# Altium PCB stm32-motor-driver.PcbDoc
Units mil, origin at the board's own origin, x right, y up, seen from the top; angles counter-clockwise.
Board outline 1479 x 1039 mil, 4 copper layers (L1, L2, L3, L4), stack 63.43 mil thick; 20 components, 24 nets, 118 pads, 126 vias.
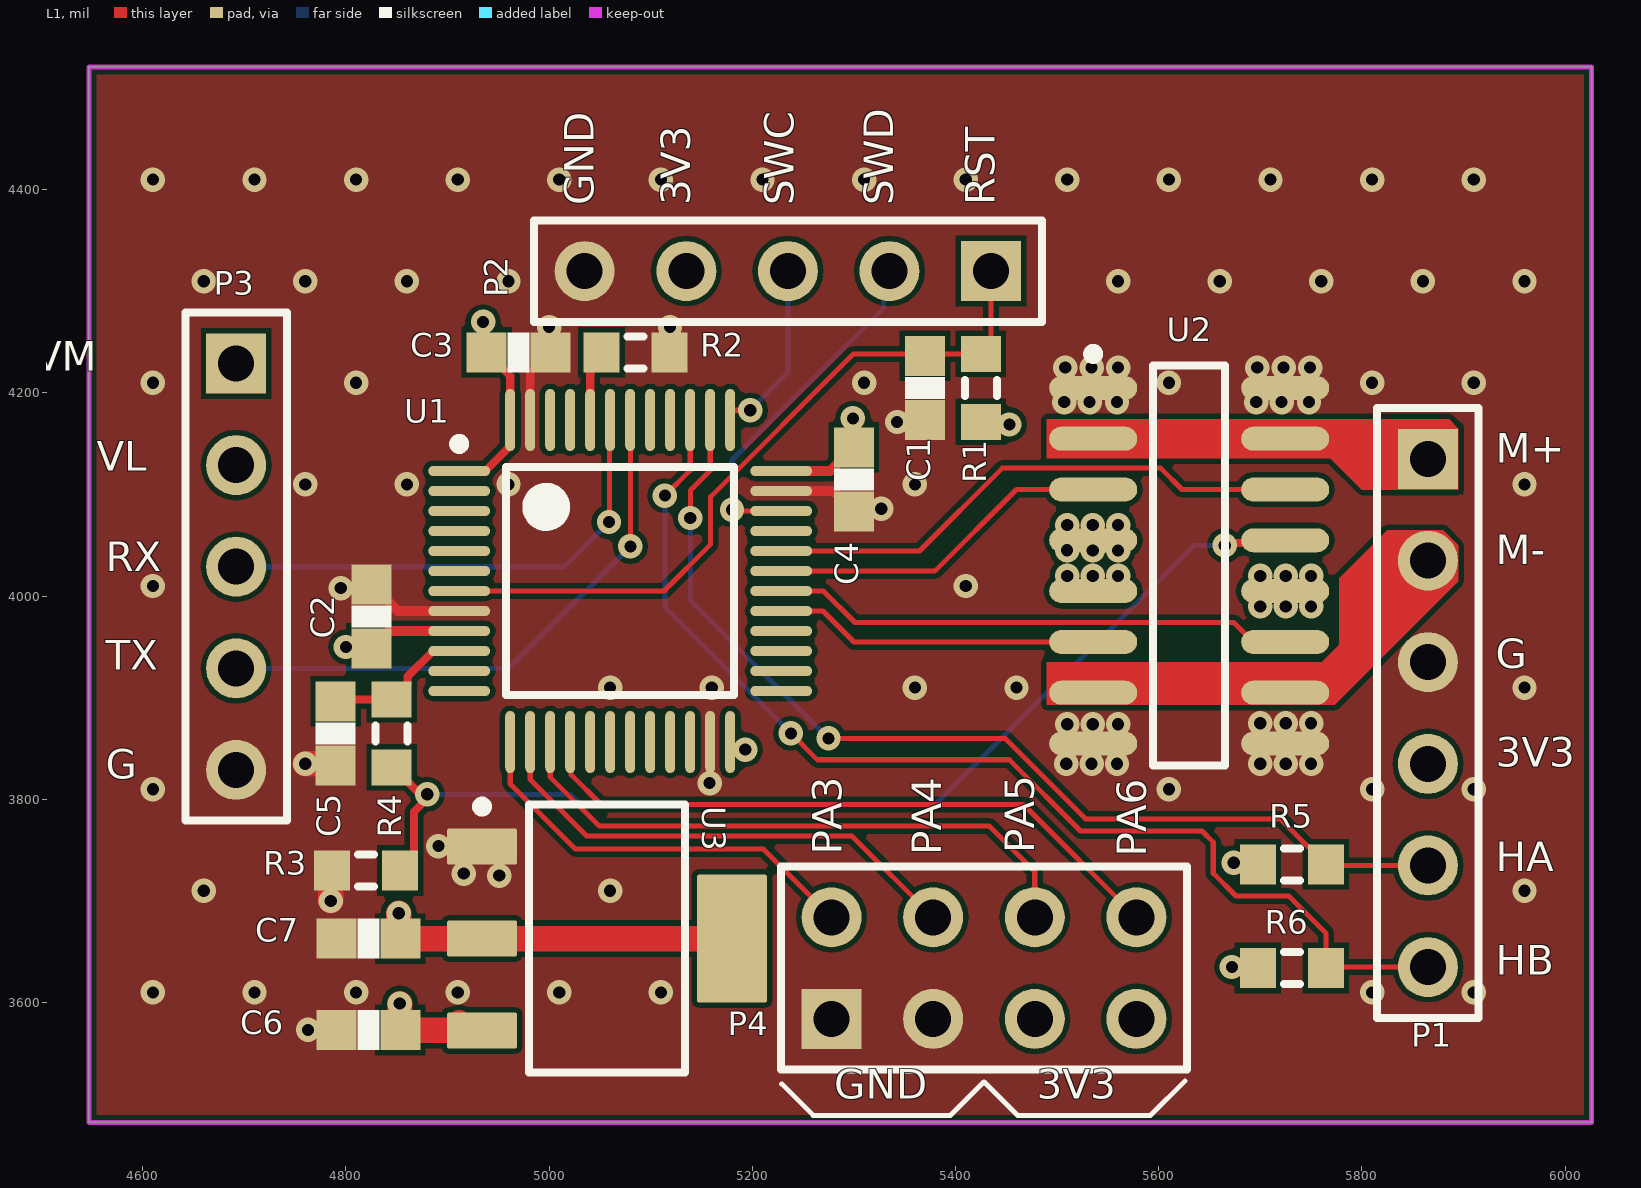
[diagram p0: L1 view]
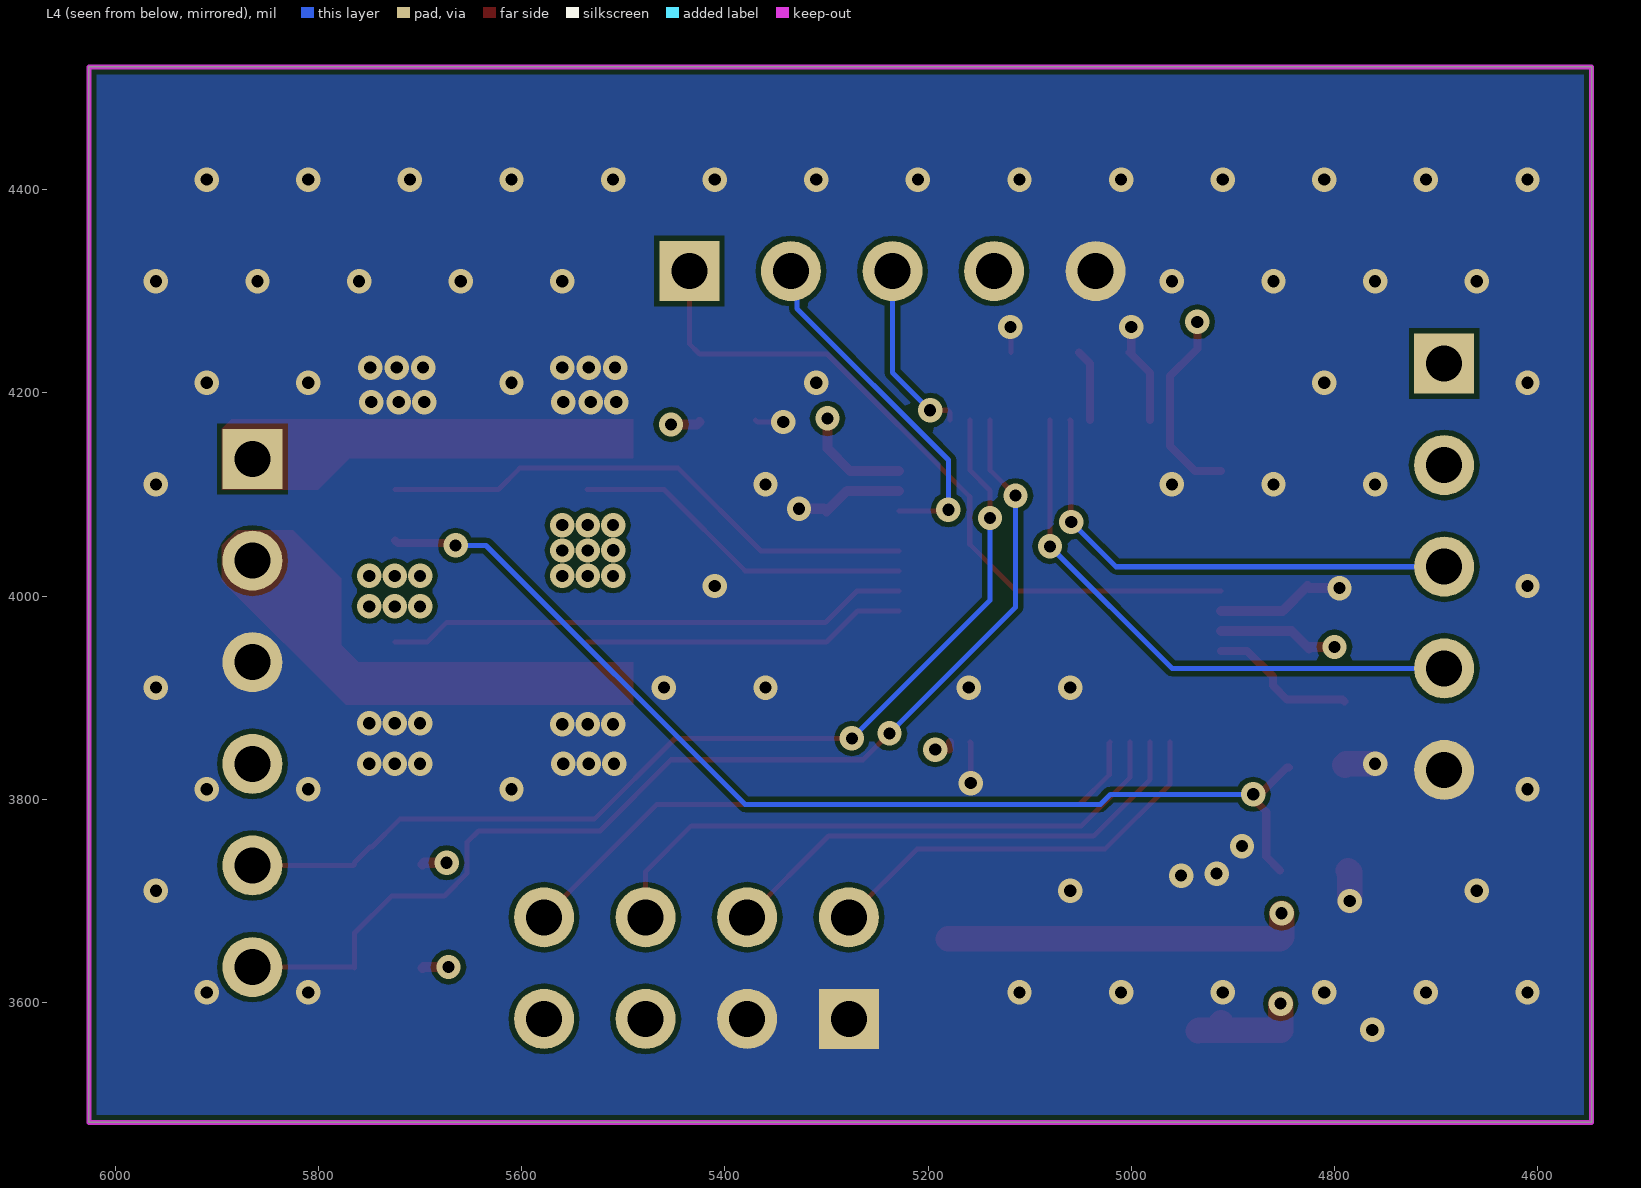
[diagram p1: L4 view, seen from below]
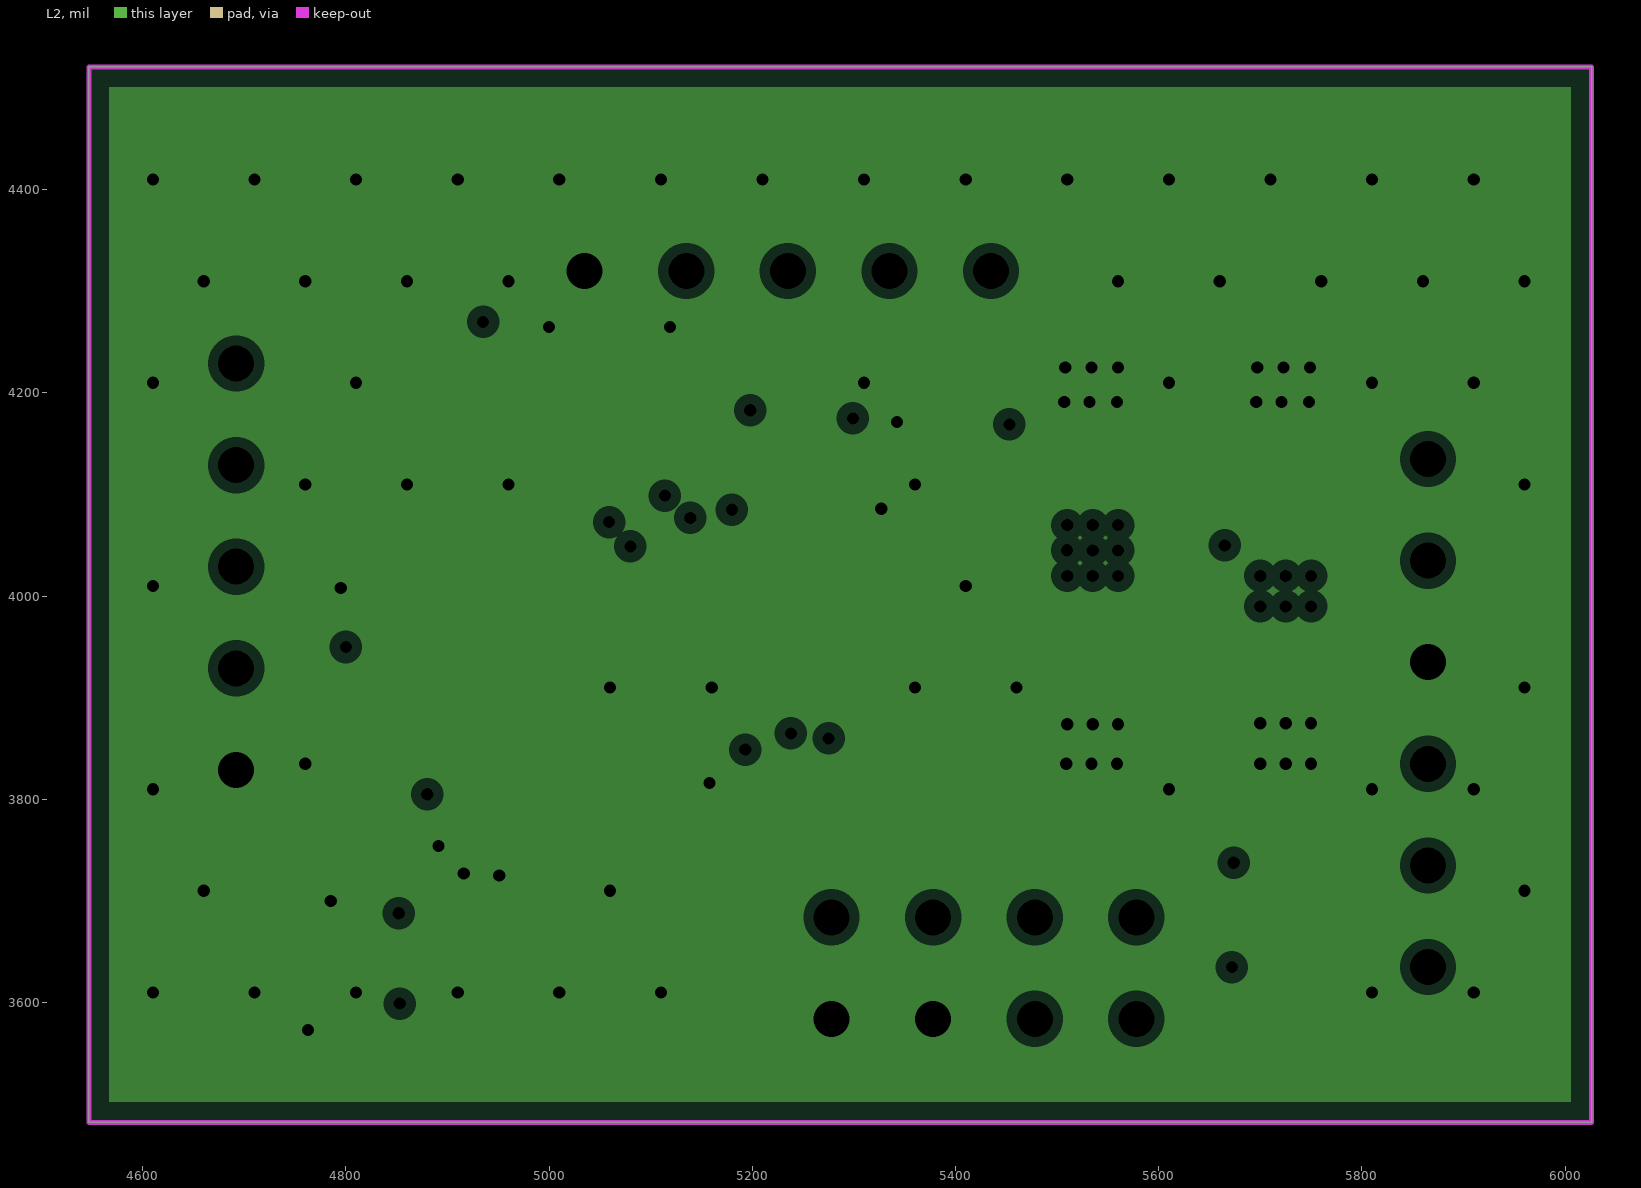
[diagram p2: L2, clearances drawn from the general rule]
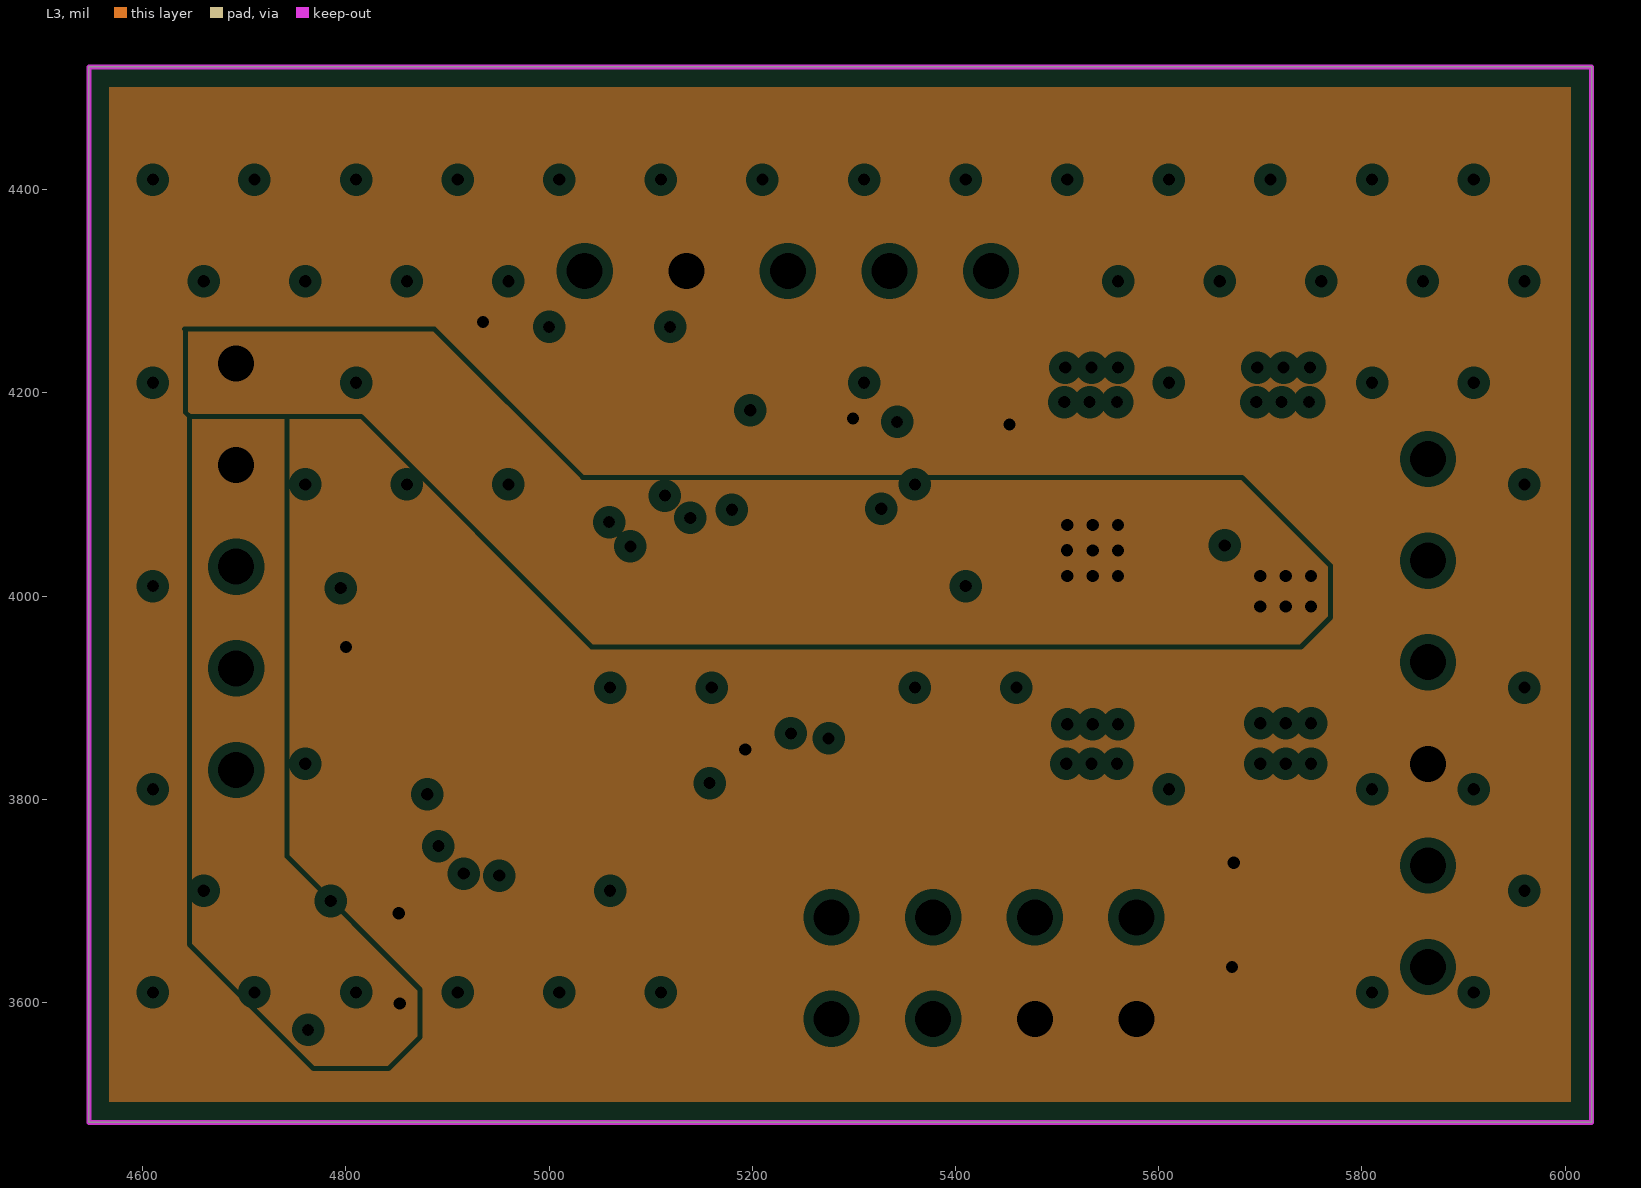
[diagram p3: L3, clearances drawn from the general rule]
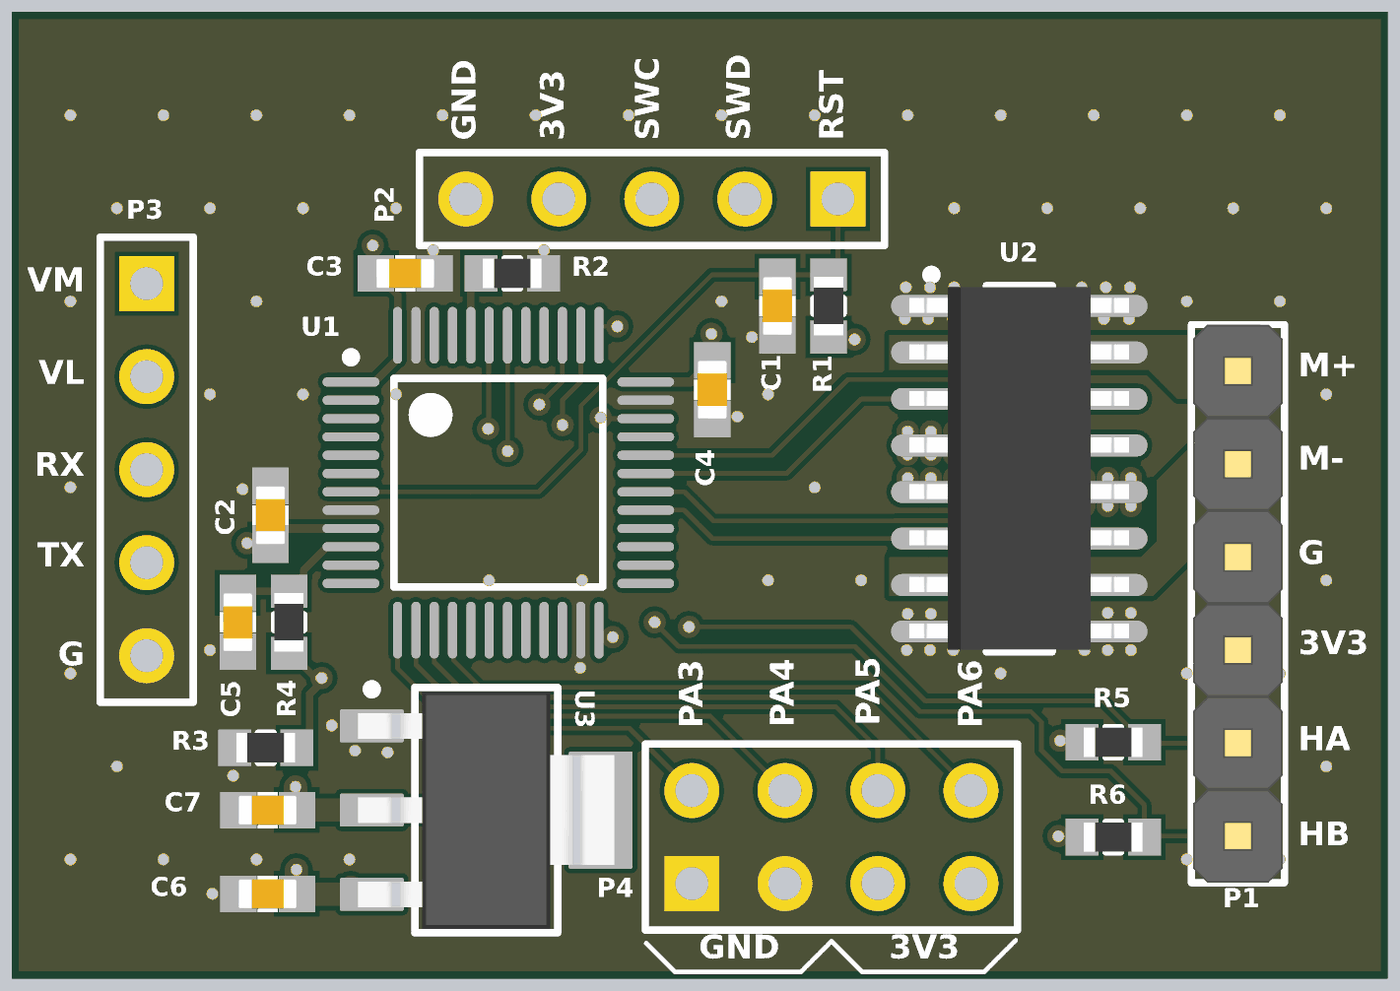
[diagram p4: 3D render of the assembled board from above, using the file's embedded part models]

## Layer stack, top to bottom
Top Solder: solder mask 0.4, Solder Resist, Dk 3.5
L1: signal copper 1.4
Dielectric 2: prepreg 3.937, PP-006, Dk 4.1
L2: plane copper 1.378, net GND
Dielectric 1: dielectric 50, FR-4, Dk 4.8
L3: plane copper 1.378, net (Multiple Nets)
Dielectric 3: prepreg 3.937, PP-006, Dk 4.1
L4: signal copper 1.4
Bottom Solder: solder mask 0.4, Solder Resist, Dk 3.5

## Board outline
4547,3482 4547,4521 6026,4521 6026,3482

## Design rules (kind name [scope] priority, off if disabled: settings)
Clearance [All] p1: gap=5 ignorepadtopadclearanceinfootprint=TRUE
ComponentClearance [All] p1: gap=0 collisioncheckmode=3 verticalgap=10 showdistances=FALSE
HoleSize [All] p1: absolutevalues=TRUE maxlimit=250 minlimit=12 maxpercent=80.000 minpercent=20.000
MinimumSolderMaskSliver [All] p1 off: minsoldermaskwidth=0
PlaneClearance [All] p1: clearance=10
PlaneConnect [All] p1: planeconnectstyle=Direct reliefexpansion=20 reliefentries=4 reliefconductorwidth=10 reliefairgap=10
PolygonConnect [All] p1: connectstyle=Direct reliefconductorwidth=10 reliefentries=4 polygonreliefangle="90 Angle" airgapwidth=10
RoutingVias [All] p1: holewidth=12 width=24 viastyle="Through Hole" minholewidth=12 minwidth=24 maxholewidth=100 maxwidth=200 useviatemplates=TRUE viatemplateguid#1={1C40CA77-43A6-4E52-A6EE-6E91B8191E52} viatemplatename#1=v61h30m0mx0
SilkToSilkClearance [All] p1 off: silktosilkclearance=0
SilkToSolderMaskClearance [IsPad] p1 off: minsilkscreentomaskgap=0 clearancetoexposedcopper=TRUE
SolderMaskExpansion [All] p1: expansion=0 istentingtop=FALSE
Width [All] p1: maxlimit=1000 minlimit=5 preferedwidth=5 minimp=50.000000 maximp=50.000000 favimp=50.000000
23 further rules are at their usual default settings.

## Components (designator, comment, footprint, x,y, rotation, side; value= is the part's Value field where it differs from the comment)
C1 "100n CAPC1608N" CAPC1608N 5370,4205 r90 top value=100n
C2 "100n CAPC1608N" CAPC1608N 4825,3980 r270 top value=100n
C3 "100n CAPC1608N" CAPC1608N 4970,4240 r180 top value=100n
C4 "100n CAPC1608N" CAPC1608N 5300,4115 r90 top value=100n
C5 "100n CAPC1608N" CAPC1608N 4790,3865 r90 top value=100n
C6 "1uF CAPC1608N" CAPC1608N 4822,3573 r0 top value=1uF
C7 "10uF CAPC1608N" CAPC1608N 4822,3663 r0 top value=10uF
P1 "Header 6" HDR1X6-PINS 5865,4135 r270 top
P2 "Header 5" HDR1X5 5435,4320 r180 top
P3 "Header 5" HDR1X5 4692,4229 r270 top
P4 "Header 4X2" HDR2X4 5278,3584 r0 top
R1 "10k RESC1608N" RESC1608N 5425,4205 r270 top value=10k
R2 "10k RESC1608N" RESC1608N 5085,4240 r180 top value=10k
R3 "1k RESC1608N" RESC1608N 4820,3730 r0 top value=1k
R4 "10k RESC1608N" RESC1608N 4845,3865 r90 top value=10k
R5 "10k RESC1608N" RESC1608N 5731,3736 r180 top value=10k
R6 "10k RESC1608N" RESC1608N 5731,3634 r180 top value=10k
U1 "STM32F103C8T6" STM-LQFP48_L 5070,4015 r0 top
U2 "VNH7100BASTR" SOIC127P600-16N 5630,4030 r0 top
U3 "1117-3.3" DCY0004A_N 5057,3663 r0 top

## Footprints (in the part's own frame and the unit in brackets; to place one, negate y for a bottom-side part, rotate by r counter-clockwise, add the part's x,y. Pads: shape width x height; smd on the part's side, far side on the other; paste and mask are expansions set on the pad)
CAPC1608N [mm] "Chip Capacitor (0603), Body 1.6x0.8mm, IPC Medium Density"
  rect 1x1 smd: 1(-0.8,0) 2(0.8,0)
  silkscreen extent -0.28,-0.5 0.28,0.5, body extent -0.8,-0.41 0.8,0.41, height 0.91
DCY0004A_N [mm] "SOT223, 4-Leads, Body 6.7x3.7mm, Pitch 2.3mm, IPC Medium Density"
  rrect11% 1.75x0.9 smd: 1(-3.125,2.3) 2(-3.125,0) 3(-3.125,-2.3)
  rrect6% 1.75x3.2 smd: 4(3.125,0)
  silkscreen extent -3.25,-3.35 1.95,3.42, body extent -3.5,-3.25 3.5,3.25, height 1.62
HDR1X5 [mm] "Connector; Header; 5 Position"
  rect 1.5x1.5 hole 0.9: 1(0,0)
  round 1.5 hole 0.9: 2(2.54,0) 3(5.08,0) 4(7.62,0) 5(10.16,0)
  silkscreen extent -1.27,-1.27 11.43,1.27
HDR1X6-PINS [mm] "Connector; Header; 6 Position"
  rect 1.5x1.5 hole 0.9: 1(0,0)
  round 1.5 hole 0.9: 2(2.54,0) 3(5.08,0) 4(7.62,0) 5(10.16,0) 6(12.7,0)
  silkscreen extent -1.27,-1.27 13.97,1.27, body extent -1.27,-1.22 13.97,1.22, height 10.3
HDR2X4 [mm] "Connector; Header; 4x2 Position"
  rect 1.5x1.5 hole 0.9: 1(0,0)
  round 1.5 hole 0.9: 2(0,2.54) 3(2.54,0) 4(2.54,2.54) 5(5.08,0) 6(5.08,2.54) 7(7.62,0) 8(7.62,2.54)
  silkscreen extent -1.27,-1.27 8.89,3.81
RESC1608N [mm] "Chip Resistor, Body 1.6x0.8mm, IPC Medium Density"
  rect 0.9x1 smd: 1(-0.85,0) 2(0.85,0)
  silkscreen extent -0.2,-0.4 0.2,0.4, body extent -0.8,-0.4 0.8,0.4, height 0.55
SOIC127P600-16N [mm] "SOIC, 16-Leads, Body 9.9x3.9mm, Pitch 1.27mm, IPC Medium Density"
  oval 2.2x0.6 smd: 1(-2.4,4.445) 2(-2.4,3.175) 3(-2.4,1.905) 4(-2.4,0.635) 5(-2.4,-0.635) 6(-2.4,-1.905) 7(-2.4,-3.175) 8(-2.4,-4.445) 9(2.4,-4.445) 10(2.4,-3.175) 11(2.4,-1.905) 12(2.4,-0.635) 13(2.4,0.635) 14(2.4,1.905) 15(2.4,3.175) 16(2.4,4.445)
  silkscreen extent -2.52,-5 0.9,5.42, body extent -3.01,-4.94 2.99,4.97, height 1.4
STM-LQFP48_L [mm] "QFP, 48-Leads, Body 7x7mm, Pitch 0.5mm, IPC High Density"
  oval 1.55x0.25 smd: 1(-4.025,2.75) 2(-4.025,2.25) 3(-4.025,1.75) 4(-4.025,1.25) 5(-4.025,0.75) 6(-4.025,0.25) 7(-4.025,-0.25) 8(-4.025,-0.75) 9(-4.025,-1.25) 10(-4.025,-1.75) 11(-4.025,-2.25) 12(-4.025,-2.75) 25(4.025,-2.75) 26(4.025,-2.25) 27(4.025,-1.75) 28(4.025,-1.25) 29(4.025,-0.75) 30(4.025,-0.25) 31(4.025,0.25) 32(4.025,0.75) 33(4.025,1.25) 34(4.025,1.75) 35(4.025,2.25) 36(4.025,2.75)
  oval 0.25x1.55 smd: 13(-2.75,-4.025) 14(-2.25,-4.025) 15(-1.75,-4.025) 16(-1.25,-4.025) 17(-0.75,-4.025) 18(-0.25,-4.025) 19(0.25,-4.025) 20(0.75,-4.025) 21(1.25,-4.025) 22(1.75,-4.025) 23(2.25,-4.025) 24(2.75,-4.025) 37(2.75,4.025) 38(2.25,4.025) 39(1.75,4.025) 40(1.25,4.025) 41(0.75,4.025) 42(0.25,4.025) 43(-0.25,4.025) 44(-0.75,4.025) 45(-1.25,4.025) 46(-1.75,4.025) 47(-2.25,4.025) 48(-2.75,4.025)
  silkscreen extent -4.15,-2.85 2.85,3.55, body extent -3.5,-3.5 3.5,3.5, height 1.6

## Part data
C1 C2 C3 C4 C5 C6 C7: library part "Cap Chip", "Capacitor", Tolerance=%
P1: "Header, 6-Pin", LatestRevisionDate=17-Jul-2002, LatestRevisionNote="Re-released for DXP Platform.", Publisher="Altium Limited"
P2 P3: "Header, 5-Pin", LatestRevisionDate=17-Jul-2002, LatestRevisionNote="Re-released for DXP Platform.", Publisher="Altium Limited"
P4: "Header, 4-Pin, Dual row", LatestRevisionDate=17-Jul-2002, LatestRevisionNote="Re-released for DXP Platform.", Publisher="Altium Limited"
R1 R2 R3 R4 R5 R6: library part "Res Chip", "Chip Resistor", Tolerance=%
U1: library part CMP-0237-00215-3, "ARM Cortex-M3 32-bit MCU, 64 KB Flash, 20 KB Internal RAM, 37 I/Os, 48-pin LQFP, -40 to 85 degC, Tray", I/Os (High Current)=37, Operating Frequency(F) (Processor speed) (MHz)=72, Supply Voltage(Vcc) min (V)=2, A/D Converter="2x12-bit (10 Channel)", ComponentLink1Description="Manufacturer URL", ComponentLink1URL=http://www.st.com/web/en/home.html, ComponentLink2Description=Datasheet, ComponentLink2URL=http://www.st.com/st-web-ui/static/active/en/resource/technical/document/datasheet/CD00161566.pdf, ComponentLink3Description="Package Specification", ComponentLink3URL=http://www.st.com/st-web-ui/static/active/en/resource/technical/document/datasheet/DM00058181.pdf, Core="ARM Cortex-M3", DatasheetVersion="Rev. 16", FLASH Size (Prog) (kB)=64, Internal RAM Size (kB)=20, Mounting Technology="Surface Mount", PackageDescription="48-Pin Low Profile Quad Flat Package, 7 x 7 mm Body, 0.5 mm Pitch", PackageReference=LQFP48, PackageVersion="Rev. 6, 06/2013", Packing=Tray, PartNumber=STM32F103C8T6
U2: "SO 16 .15 TO JEDEC MS-012", Current - Output=15A, Manufacturer=STMicroelectronics, Operating Temperature="-40°C ~ 150°C (TJ)", Package / Case="16-SOIC (0.154\", 3.90mm Width)", Supplier Device Package=16-SO, Supplier Part Number 1=497-17627-1-ND, Voltage - Load="4 V ~ 28 V", Applications=Automotive, Category="Integrated Circuits (ICs)", ComponentLink1Description=http://www.st.com/content/ccc/resource/technical/document/datasheet/group3/28/a2/d7/89/b7/da/4f/5c/DM00314832/files/DM00314832.pdf/jcr:content/translations/en.DM00314832.pdf, ComponentLink1URL=http://www.st.com/content/ccc/resource/technical/document/datasheet/group3/28/a2/d7/89/b7/da/4f/5c/DM00314832/files/DM00314832.pdf/jcr:content/translations/en.DM00314832.pdf, Function="Driver - Fully Integrated, Control and Power Stage", Interface=PWM, Manufacturer Part Number=VNH7100BASTR, Motor Type - AC, DC="Brushed DC", Motor Type - Stepper=-, Mounting Type="Surface Mount", Output Configuration="Half Bridge (2)", Packaging="Cut Tape (CT)", Part Status=Active, Pricing 1="1=3.2, 10=2.871, 100=2.352, 500=2.00218, 1000=1.68858 (USD)", RoHS="RoHS Compliant", Step Resolution=-, Stock 1=100, Supplier 1=Digi-Key, Technology="Power MOSFET", Voltage - Supply="4 V ~ 28 V"
U3: library part CMP-0062-01631-4, "800mA Low-Dropout Linear Regulator, 4-pin SOT-223, Pb-Free", Manufacturer="Texas Instruments", PackageTopMarking=XYTT*N05B, PartNumber=LM1117IMP-3.3/NOPB, PowerWise=N, Code_IPC=SOT223-4, Code_JEDEC=TO-261-AA, ComponentLink1Description="Datasheet URL", ComponentLink1URL=http://www.ti.com/general/docs/lit/getliterature.tsp?genericPartNumber=LM1117-N&fileType=pdf, CompType="LDO IC", High-Reliability=Y, PackageDescription="Molded SOT-223, 6.50 x 3.56 x 1.6mm Body, 4 Lead, 2.3mm Pitch", PackageReference=DCY0004A, PinCount=4, RoHS=Y

## Via types
v1: diameter 24, hole 12, L1 to L4, tented both sides, 126 vias

## Nets (pads, with @x,y where several pads share a name; then routed paths per layer and width w, separated by ;. In a path a pad name is that pad's centre, name@x,y a point inside that pad or via, vN(x,y) a via of type N, cw(c..) or ccw(c..) an arc to the next point about the centre after c; other vN are vias at no path point)
3V3: C2.2 C3.2 C4.2 C7.2 P1.4 P2.4 P4.5 P4.7 R1.2 R5.2 R6.2 U1.1 U1.9 U1.24 U1.36 U1.48 U3.2 U3.4 | length 875.4
  L1 w8: U1.1 4937.13,4123.27 4961.73,4147.87 U1.48 4961.73,4216.77 C3.2 4935,4243.5 v1(4935,4270) ; U1.24 5178.27,3849.85 5179.12,3849 v1(5193,3849)
  L1 w10: v1(4800,3950) 4823.5,3950 C2.2 4842.28,3965.79 U1.9 ; U1.36 5276.77,4123.27 5299,4145.5 v1(5299,4175) ; R1.2 5427.54,4169 v1(5453,4169) ; v1(5672,3635) 5696.54,3635 R6.2 ; v1(5673.93,3737.65) 5695.88,3737.65 R5.2
  L1 w25: v1(4852,3688) 4852,3664.5 C7.2 U3.2 U3.4
CS: R3.2 R4.1 U2.13 | length 1088.3
  L1 w8: R4.1 4846.97,3831.54 4873.5,3805 v1(4880,3805) 4880,3800.67 4867.18,3787.85 4867.18,3743.72 R3.2 ; v1(5665,4050) 5667.5,4052.5 5721.99,4052.5 U2.13
  L4 w5: v1(4880,3805) 5020.51,3805 5030.51,3795 5380,3795 5635,4050 v1(5665,4050)
CS_FILTERED: C5.2 R4.2 U1.10 | length 147.2
  L1 w8: C5.2 4791.97,3898.46 R4.2 4846.97,3898.46 4860.69,3912.18 4860.69,3920.85 4885.94,3946.1 U1.10
GND: C1.1 C2.1 C3.1 C4.1 C5.1 C6.1 C7.1 P1.3 P2.5 P3.5 P4.1 P4.3 R2.1 R3.1 U1.8 U1.23 U1.35 U1.47 U2.1 U2.8 U2.9 U2.16 U3.1 | length 491.5
  L1 w5: R2.1 5118.46,4264.46 v1(5119,4265) ; v1(5158,3816) 5158,3855.95 U1.23 ; v1(5342.5,4171.5) 5368,4171.5 C1.1
  L1 w8: U1.47 4981.42,4219.92 C3.1 5000,4241.5 v1(5000,4265)
  L1 w10: v1(4795,4008) 4824.5,4008 4826.5,4010 4851.02,3985.47 U1.8 ; U1.35 5279.92,4103.58 C4.1 5302.5,4086 v1(5327,4086)
  L1 w25: v1(4760,3835) 4788.5,3835 C5.1 ; v1(4785,3700) 4785,3728.46 R3.1
  other v1: 4762.74,3573.11 4610,3610 4710,3610 4810,3610 4910,3610 5010,3610 5110,3610 5810,3610 5910,3610 4660,3710 5060,3710 5960,3710 4951,3725 4916,3727 4891,3754 4610,3810 5610,3810 5810,3810 5910,3810 5509,3835 5534,3835 5559,3835 5700,3835 5725,3835 5750,3835 5510,3874 5535,3874 5560,3874 5700,3875 5725,3875 5750,3875 5060,3910 5160,3910 5360,3910 5460,3910 5960,3910 4610,4010 5410,4010 4760,4110 4860,4110 4960,4110 5360,4110 5960,4110 5507,4191 5532,4191 5559,4191 5695.98,4191 5720.98,4191 5747.98,4191 4610,4210 4810,4210 5310,4210 5610,4210 5810,4210 5910,4210 5508,4225 5534,4225 5560,4225 5696.98,4225 5722.98,4225 5748.98,4225 4660,4310 4760,4310 4860,4310 4960,4310 5560,4310 5660,4310 5760,4310 5860,4310 5960,4310 4610,4410 4710,4410 4810,4410 4910,4410 5010,4410 5110,4410 5210,4410 5310,4410 5410,4410 5510,4410 5610,4410 5710,4410 5810,4410 5910,4410
HALLA: P1.5 R5.1 U1.38 | length 1020.8
  L1 w5: v1(5139,4077) 5139,4104.1 5158.58,4123.68 U1.38 ; v1(5275,3860) 5449,3860 5528.5,3780.5 5719.96,3780.5 5747.28,3753.19 5749.25,3753.19 5764.46,3737.97 R5.1 5765.46,3735 P1.5
  L4 w5: v1(5139,4077) 5139,3996 v1(5275,3860)
HALLB: P1.6 R6.1 U1.39 | length 1131.3
  L1 w5: v1(5114,4099) 5138.9,4123.9 U1.39 ; v1(5238,3865) 5264,3839 5453,3839 5523,3769 5642.53,3769 5653.71,3757.82 5653.71,3727.29 5676,3705 5728,3705 5764.46,3668.54 R6.1@5764.46,3635.97 ; R6.1 R6.1@5764.46,3635.97 ; P1.6 5765.43,3635 R6.1@5764.46,3635.97
  L4 w5: v1(5114,4099) 5114,3989 v1(5238,3865)
INA: U1.31 U2.3 | length 340
  L1 w5: U1.31@5228.62,4025 5380,4025 5460,4105 U2.3
INB: U1.29 U2.6 | length 319.7
  L1 w5: U1.29 5269.53,3985.47 5300,3955 U2.6
MOTOR+: P1.1 U2.2 U2.15
MOTOR-: P1.2 U2.7 U2.10
NetR2_2: R2.2 U1.44 | length 71.1
  L1 w8: U1.44 5040.47,4228.94 R2.2
NRST: C1.2 P2.1 R1.1 U1.7 | length 723.3
  L1 w5: U1.7 5113.16,4005.16 5159,4051 5159,4098 5299.46,4238.46 R1.1 5435,4248.46 P2.1
PA3: P4.2 U1.13 | length 411.9
  L1 w5: U1.13 4961.73,3815.27 5026,3751 5211,3751 P4.2
PA4: P4.4 U1.14 | length 489.7
  L1 w5: U1.14 4981.42,3819.58 5037,3764 5298,3764 P4.4
PA5: P4.6 U1.15 | length 595
  L1 w5: U1.15 5001.1,3821.9 5049,3774 5433,3774 5478,3729 P4.6
PA6: P4.8 U1.16 | length 647
  L1 w5: U1.16 5021.7,3855.62 5021.7,3824.3 5051,3795 5467,3795 P4.8
PWM: U1.30 U2.11 | length 517.1
  L1 w5: U1.30 5269.84,4005.16 5301,3974 5495.71,3974 5496.02,3974.31 5673.68,3974.31 5692.99,3955 U2.11
RX: P3.3 U1.43 | length 486.2
  L1 w5: v1(5059,4073) 5059.58,4073.58 5059.58,4172.89 U1.43
  L4 w5: P3.3 5015,4029 v1(5059,4073)
SEL0: U1.32 U2.14 | length 538.5
  L1 w5: U1.32 5364.53,4044.53 5446,4126 5601.89,4126 5622.89,4105 U2.14
SWCLK: P2.3 U1.37 | length 180.3
  L1 w5: U1.37 5178.27,4180.76 5180.5,4183 v1(5198,4183)
  L4 w5: v1(5198,4183) 5235,4220 P2.3
SWDIO: P2.2 U1.34 | length 348.1
  L1 w5: v1(5180,4085) 5188,4085 5189.1,4083.9 U1.34
  L4 w5: v1(5180,4085) 5180,4134 5328.97,4282.97 5328.97,4313.97 P2.2
TX: P3.4 U1.42 | length 562.2
  L1 w5: U1.42 5079.92,4173.39 5079.92,4049.08 v1(5080,4049)
  L4 w5: P3.4 4960,3929 v1(5080,4049)
VLOGIC: C6.2 P3.2 U3.3 | length 107.9
  L1 w25: v1(4853,3599) 4853,3572.5 C6.2 ; C6.2@4853.77,3572.72 4933.69,3572.72 U3.3 ; U3.3@4911.5,3580 U3.3@4911.77,3579.72
VM: P3.1 U2.4 U2.5 U2.12
  other v1: 5700,3990 5725,3990 5750,3990 5510,4020 5535,4020 5560,4020 5700,4020 5725,4020 5750,4020 5509.85,4045.28 5535,4045 5560,4045 5510,4070 5535,4070 5560,4070
pads on no net: U1.2 U1.3 U1.4 U1.5 U1.6 U1.11 U1.12 U1.17 U1.18 U1.19 U1.20 U1.21 U1.22 U1.25 U1.26 U1.27 U1.28 U1.33 U1.40 U1.41 U1.45 U1.46

## Polygon pours and split planes (outlines as drawn)
GND on L4 "COM" (solid, remove dead copper, pour order 0): 4547,4521 6026,4521 6026,3482 4547,3482
GND on L1 "COM" (solid, remove dead copper, pour order 1): 4547,4521 6026,4521 6026,3482 4543.29,3482
GND on L2 (split plane): 6005.9,3502.1 4567.1,3502.1 4567.1,4500.9 6005.9,4500.9
VM on L3 (split plane): 5031.2,4115.2 5032.02,4114.65 5033,4114.45 5680.94,4114.45 5766.45,4028.94 5766.45,3980.06 5738.94,3952.55 5043.06,3952.55 4816.8,4178.8 4815.98,4179.35 4815,4179.55 4647.06,4179.55 4644.55,4182.06 4644.55,4260.45 4885.94,4260.45
VLOGIC on L3 (split plane): 4739.45,3960 4739.45,3744 4739.65,3743.02 4740.2,3742.2 4870.45,3611.94 4870.45,3567.06 4840.94,3537.55 4769.06,3537.55 4648.55,3658.06 4648.55,4174.45 4739.45,4174.45
3V3 on L3 (split plane): 6005.9,3502.1 4567.1,3502.1 4567.1,4500.9 6005.9,4500.9

## Keep-outs
Keep-Out Layer:
  lines w5: 4547,3482 4547,4372 4547,4521 6026,4521 6026,3482 4547,3482

## Other copper
L1:
  region net MOTOR-: 5490,3893 5773.27,3893 5895,4014.73 5895,4050 5880,4065 5825,4065 5777.81,4017.81 5777.81,3952.45 5760.37,3935 5490,3935
  region net MOTOR+: 5490,4174 5886,4174 5895,4165 5895,4105 5800,4105 5769,4136 5490,4136
L3 (plane layer: these items are gaps in the copper):
  lines w5: 4641,4263 4887,4263 5033,4117 5682,4117 5769,4030 5769,3979 5740,3950 5042,3950 4815,4177 4646,4177 ; 4642,4263 4642,4181 4646,4177 ; 4742,4177 4742,3960 4742,3744 4873,3613 4873,3566 4842,3535 4768,3535 4646,3657 4646,4177

## Silkscreen, mask and mechanical layers (free items; w line width, h text height)
Top Overlay:
  lines w5: 5229,3520 5260,3489 5395,3489 5428,3522 5461,3489 5592,3489 5626,3523
  text "GND" at 5053.71,4385 h50 r90
  text "3V3" at 5148.71,4385 h50 r90
  text "SWC" at 5250.71,4385 h50 r90
  text "SWD" at 5348.71,4385 h50 r90
  text "RST" at 5448.7,4385 h50 r90
  text "VM" at 4492.72,4212.01 h50
  text "M+" at 5931.62,4121.44 h50
  text "VL" at 4554.58,4113.67 h50
  text "M-" at 5931.62,4021.78 h50
  text "RX" at 4563.59,4014.67 h50
  text "G" at 5931.62,3919.29 h50
  text "TX" at 4563.59,3917.78 h50
  text "3V3" at 5931.62,3822.29 h50
  text "G" at 4563.8,3810.29 h50
  text "PA5" at 5487.55,3746.84 h50 r90
  text "PA3" at 5297.71,3745.33 h50 r90
  text "PA4" at 5395.71,3744.84 h50 r90
  text "PA6" at 5597.56,3743.62 h50 r90
  text "HA" at 5931.62,3719.29 h50
  text "HB" at 5931.62,3617.67 h50
  text "GND" at 5280.89,3495.29 h50
  text "3V3" at 5479.89,3495.29 h50